# Allegro board TIDA-01606_Gate DriverE4_Sch_Rev1.brd
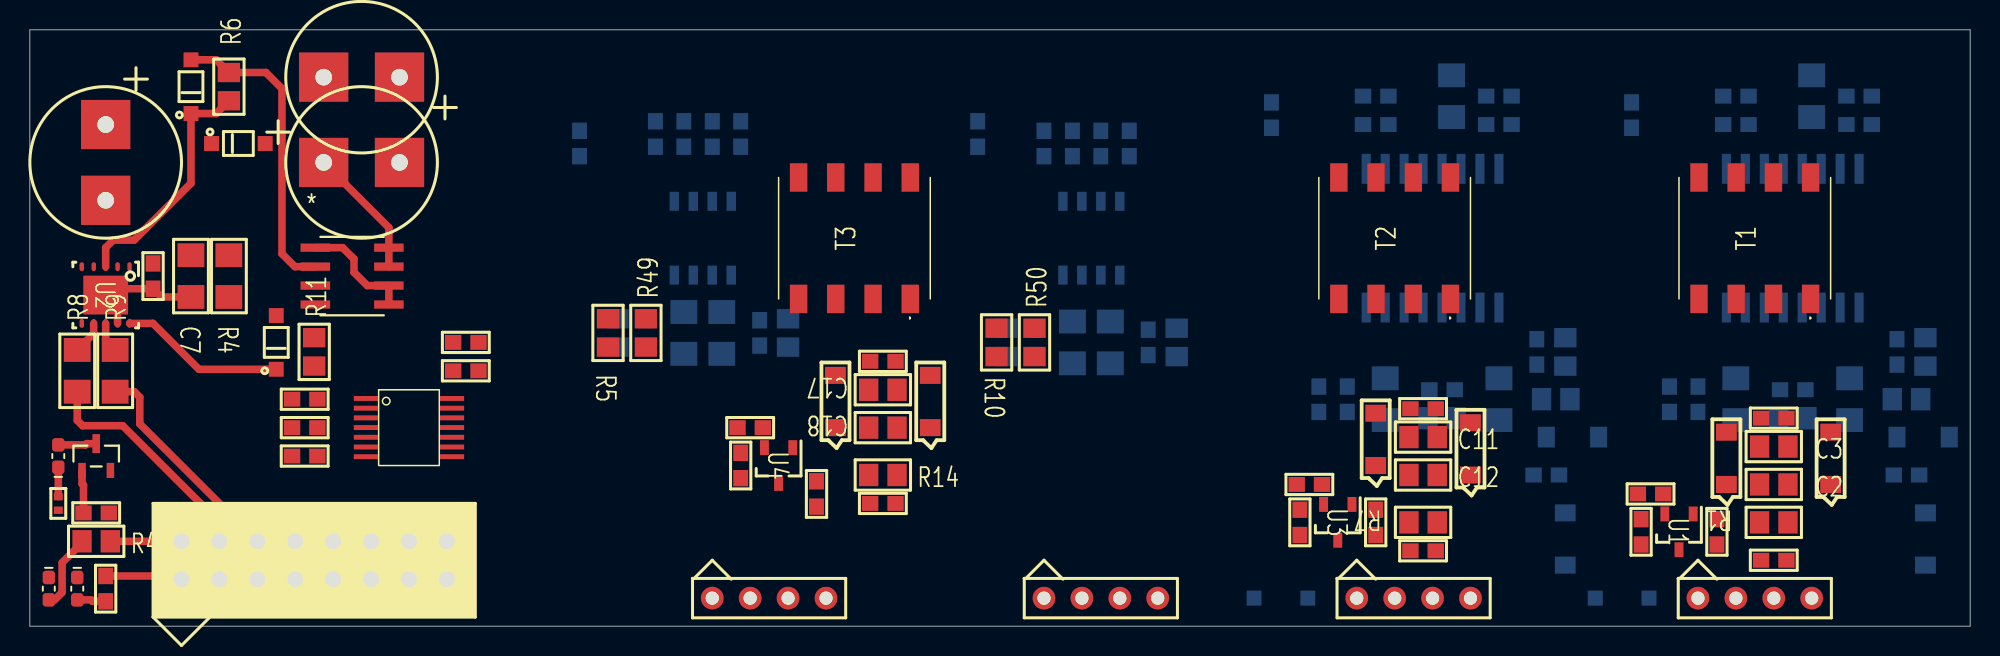
[diagram p0: board, top side]
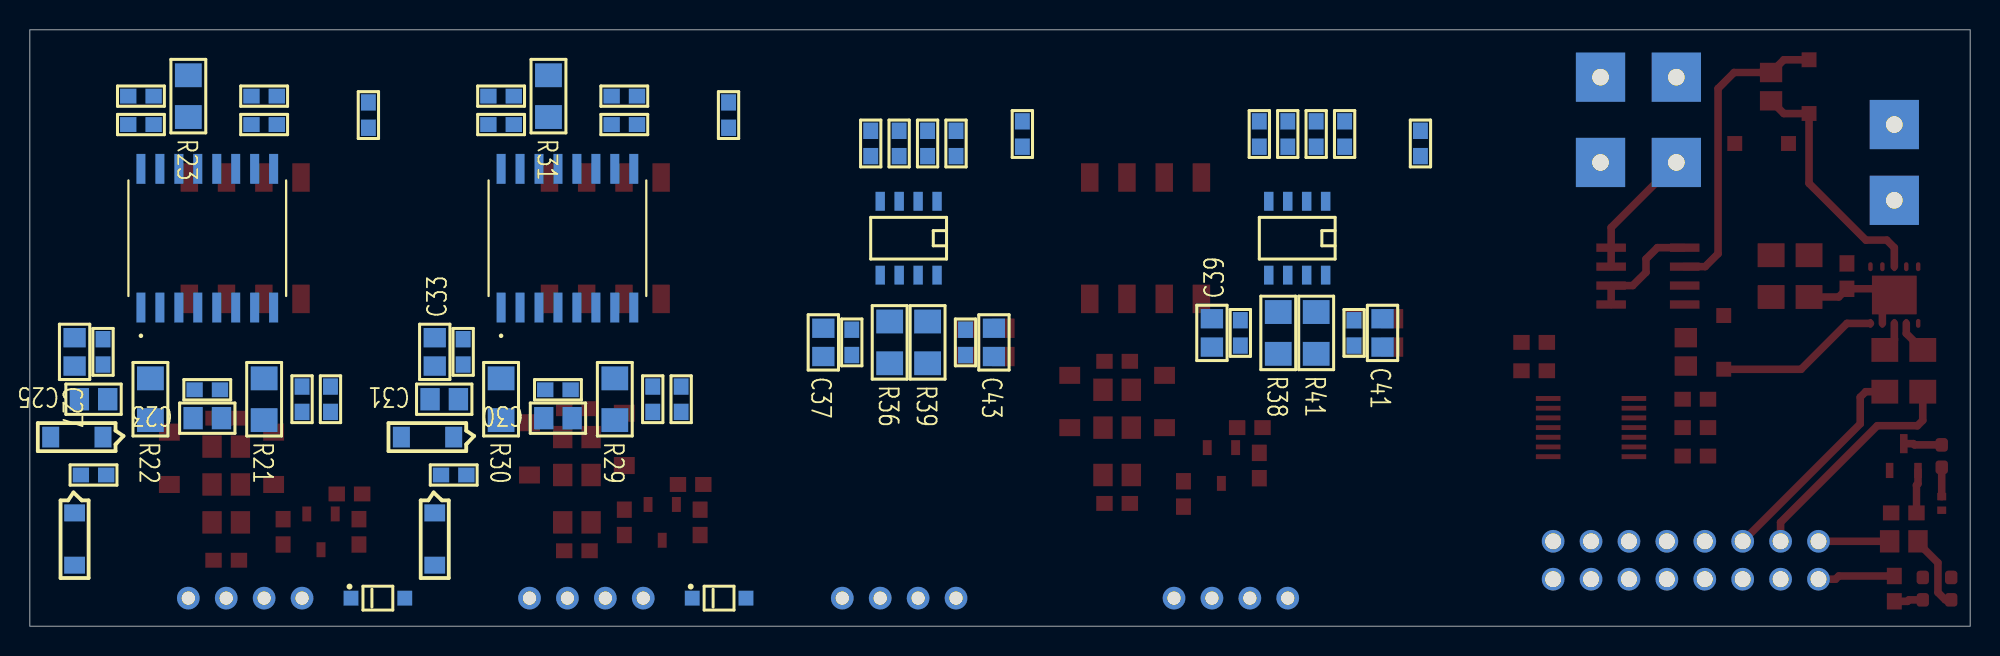
[diagram p1: board, bottom side, seen from below]

Outline 130 x 39.98 mm; copper layers: TOP, BOTTOM. Coordinates in mm from the lower left corner of the outline.
Outline path: 0,39.98 0,0 130,0 130,39.98 0,39.98

## Design rules (mm)
constraint set DEFAULT: min track width 0.127

## Placement (name value [footprint] x y rotation side)
C1  0.1u 0603 25V  [RES0603]  116.84 4.42 0 top
C2  4.7u 0805 50V  [SNPD0805_MODIFIED]  116.84 9.5 0 top
C3  4.7u 0805 50V  [SNPD0805_MODIFIED]  116.84 12.04 0 top
C4  0.1u 0603 25V  [RES0603]  116.84 13.94 0 top
C5  0.1u 0603 25V  [RES0603]  113.03 6.32 90 top
C6  3.3u 50V 105C  [CAP_SMD_PTH_470UF50V]  19.69 31.09 0 top
C7  10u 1206 50V  [SNPD1206_MODIFIED]  10.8 23.47 270 top
C8  0.33u 0603 50V  [RES0603]  8.25 23.47 270 top
C9  0.1u 63V 105C  [CAP_SMD_PTH_470UF50V]  5.08 33.63 270 top
C10  0.1u 0603 25V  [RES0603]  93.35 5.05 0 top
C11  4.7u 0805 50V  [SNPD0805_MODIFIED]  93.35 12.67 0 top
C12  4.7u 0805 50V  [SNPD0805_MODIFIED]  93.35 10.13 0 top
C13  0.1u 0603 25V  [RES0603]  93.35 14.58 0 top
C14  3.3u 50V 105C  [CAP_SMD_PTH_470UF50V]  24.77 36.8 180 top
C15  0.1u 0603 25V  [RES0603]  90.17 6.96 90 top
C16  0.1u 0603 25V  [RES0603]  57.15 8.23 180 top
C17  4.7u 0805 50V  [SNPD0805_MODIFIED]  57.15 15.85 180 top
C18  4.7u 0805 50V  [SNPD0805_MODIFIED]  57.15 13.31 180 top
C19  0.1u 0603 25V  [RES0603]  57.15 17.75 180 top
C20  0.1u 0603 25V  [RES0603]  52.71 8.86 90 top
C21  0.1u 0603 50V  [RES0603]  122.56 33.63 0 bottom
C22  0.1u 0603 50V  [RES0603]  118.11 15.85 0 bottom
C23  10u 0805 35V  [SNPD0805_MODIFIED]  118.11 13.94 0 bottom
C24  0.1u 0603 50V  [RES0603]  29.21 17.12 0 top
C25  100pF 0805 50V  [SNPD0805_MODIFIED]  125.73 15.21 0 bottom
C26  0.1u 0603 50V  [RES0603]  125.1 18.39 270 bottom
C27  10u 0805 35V  [SNPD0805_MODIFIED]  127 18.39 270 bottom
C28  0.1u 0603 50V  [RES0603]  98.43 33.63 0 bottom
C29  0.1u 0603 50V  [RES0603]  94.62 15.85 0 bottom
C30  10u 0805 35V  [SNPD0805_MODIFIED]  94.62 13.94 0 bottom
C31  100pF 0805 50V  [SNPD0805_MODIFIED]  102.24 15.21 0 bottom
C32  0.1u 0603 50V  [RES0603]  100.97 18.39 90 bottom
C33  10u 0805 35V  [SNPD0805_MODIFIED]  102.87 18.39 90 bottom
C34  0.1u 0603 50V  [RES0603]  69.85 32.36 90 bottom
C35  0.1u 0603 50V  [RES0603]  43.82 32.99 90 bottom
C36  0.1u 0603 50V  [RES0603]  74.93 19.02 270 bottom
C37  10u 0805 35V  [SNPD0805_MODIFIED]  76.84 19.02 270 bottom
C38  0.1u 0603 50V  [RES0603]  48.9 19.66 90 bottom
C39  10u 0805 35V  [SNPD0805_MODIFIED]  50.8 19.66 90 bottom
C40  0.1u 0603 50V  [RES0603]  41.28 19.66 270 bottom
C41  10u 0805 35V  [SNPD0805_MODIFIED]  39.37 19.66 270 bottom
C42  0.1u 0603 50V  [RES0603]  67.31 19.02 270 bottom
C43  10u 0805 35V  [SNPD0805_MODIFIED]  65.41 19.02 270 bottom
C44  100pF 0603 50V  [RES0603]  114.3 33.63 180 bottom
C45  100pF 0603 50V  [RES0603]  90.17 33.63 180 bottom
C46  100pF 0603 50V  [RES0603]  71.76 32.36 90 bottom
C47  100pF 0603 50V  [RES0603]  45.72 32.99 90 bottom
D1  MBR0580-TP  [SOD123]  120.65 9.5 90 top
D2  B160-13-F  [DO214]  13.97 32.36 0 top
D3  LSM115JE3/TR13  [DO214]  10.8 36.17 90 top
D4  MBR0580-TP  [SOD123]  96.52 10.13 90 top
D5  LSM115JE3/TR13  [DO214]  16.51 19.02 90 top
D6  MBR0580-TP  [SOD123]  90.17 10.77 90 top
D7  RS1MB-13-F  [DO214]  106.68 1.88 180 bottom
D8  MMSZ4699T1G 12V  [SOD123]  125.1 12.67 0 bottom
D9  RS1MB-13-F  [DO214]  83.82 1.88 180 bottom
D10  MMSZ4699T1G 12V  [SOD123]  101.6 12.67 0 bottom
D11  LED RED 0603  [LED0603]  1.91 11.4 90 top
D12  LED GREEN 0603  [LED0603]  3.18 2.51 270 top
D13  LED GREEN 0603  [LED0603]  1.27 2.51 270 top
D14  MBR0580-TP  [SOD123]  113.67 9.5 90 top
D15  MBR0580-TP  [SOD123]  60.33 13.31 90 top
D16  MBR0580-TP  [SOD123]  53.98 13.31 90 top
D17  MMSZ4683T1G 3V  [SOD123]  127 7.59 270 bottom
D18  MMSZ4683T1G 3V  [SOD123]  102.87 7.59 270 bottom
J1  HEADER 8X2  [CONN8X2]  10.16 3.15 0 top
J2  HEADER 4  [SIP4_RUP]  111.76 1.88 90 top
J3  HEADER 4  [SIP4_RUP]  88.9 1.88 90 top
J5  HEADER 4  [SIP4_RUP]  67.95 1.88 90 top
J6  HEADER 4  [SIP4_RUP]  45.72 1.88 90 top
Q1  NAMT20  [D8]  21.59 23.47 0 top
Q2  BC856A-7-F  [SOT23]  4.45 11.4 0 top
R1  4.7K 0805 5%  [SNPD0805_MODIFIED]  116.84 6.96 180 top
R2  4.99K 0603 1%  [RES0603]  108.59 8.86 0 top
R3  4.99K 0603 1%  [RES0603]  107.95 6.32 270 top
R4  0E 1206 5%  [SNPD1206_MODIFIED]  13.34 23.47 270 top
R5  0E 0805 5%  [SNPD0805_MODIFIED]  38.74 19.66 270 top
R6  17.8E 0805 1%  [SNPD0805_MODIFIED]  13.34 36.17 90 top
R7  4.7K 0805 5%  [SNPD0805_MODIFIED]  93.35 6.96 180 top
R8  0E 1206 5%  [SNPD1206_MODIFIED]  3.18 17.12 90 top
R9  0E 1206 5%  [SNPD1206_MODIFIED]  5.72 17.12 90 top
R10  0E 0805 5%  [SNPD0805_MODIFIED]  64.77 19.02 270 top
R11  17.8E 0805 1%  [SNPD0805_MODIFIED]  19.05 18.39 90 top
R12  4.99K 0603 1%  [RES0603]  85.73 9.5 0 top
R13  4.99K 0603 1%  [RES0603]  85.09 6.96 270 top
R14  4.7K 0805 5%  [SNPD0805_MODIFIED]  57.15 10.13 0 top
R15  4.99K 0603 1%  [RES0603]  48.26 13.31 0 top
R16  4.99K 0603 1%  [RES0603]  47.63 10.77 270 top
R17  10E 0603 1%  [RES0603]  122.56 35.53 180 bottom
R18  10E 0603 1%  [RES0603]  29.21 19.02 180 top
R19  100E 0603 1%  [RES0603]  114.3 35.53 0 bottom
R20  1K 0603 5%  [RES0603]  125.73 10.13 0 bottom
R21  2E 1206 1%  [SNPD1206_MODIFIED]  114.3 15.21 270 bottom
R22  2E 1206 1%  [SNPD1206_MODIFIED]  121.92 15.21 270 bottom
R23  0E 1206 5%  [SNPD1206_MODIFIED]  119.38 35.53 270 bottom
R24  0E 0603 5%  [RES0603]  18.42 15.21 0 top
R25  10K 0603 1%  [RES0603]  18.42 13.31 0 top
R26  10E 0603 1%  [RES0603]  98.43 35.53 180 bottom
R27  100E 0603 1%  [RES0603]  90.17 35.53 0 bottom
R28  1K 0603 5%  [RES0603]  101.6 10.13 0 bottom
R29  2E 1206 1%  [SNPD1206_MODIFIED]  90.81 15.21 270 bottom
R30  2E 1206 1%  [SNPD1206_MODIFIED]  98.43 15.21 270 bottom
R31  0E 1206 5%  [SNPD1206_MODIFIED]  95.25 35.53 270 bottom
R32  10K 0603 1%  [RES0603]  18.42 11.4 0 top
R33  10E 0603 1%  [RES0603]  67.95 32.36 270 bottom
R34  10E 0603 1%  [RES0603]  41.91 32.99 270 bottom
R35  100E 0603 1%  [RES0603]  73.66 32.36 270 bottom
R36  3.3E 1206 5%  [SNPD1206_MODIFIED]  72.39 19.02 270 bottom
R37  100E 0603 1%  [RES0603]  47.63 32.99 270 bottom
R38  3.3E 1206 5%  [SNPD1206_MODIFIED]  46.36 19.66 270 bottom
R39  3.3E 1206 5%  [SNPD1206_MODIFIED]  69.85 19.02 270 bottom
R40  20K 0603 1%  [RES0603]  4.45 7.59 180 top
R41  3.3E 1206 5%  [SNPD1206_MODIFIED]  43.82 19.66 270 bottom
R42  620E 0603 1%  [RES0603]  5.08 2.51 90 top
R43  1.3K 0805 5%  [SNPD0805_MODIFIED]  4.45 5.69 0 top
R44  120E 0402 5%  [RES0402]  1.91 8.23 90 top
R45  0E 0603  5%  [RES0603]  109.86 15.21 270 bottom
R46  NC  [RES0603]  111.76 15.21 270 bottom
R47  0E 0603  5%  [RES0603]  86.36 15.21 270 bottom
R48  NC  [RES0603]  88.27 15.21 270 bottom
R49  NC  [SNPD0805_MODIFIED]  41.28 19.66 90 top
R50  NC  [SNPD0805_MODIFIED]  67.31 19.02 90 top
R51  10K 0603 1%  [RES0603]  36.83 32.36 270 bottom
R52  10K 0603 1%  [RES0603]  63.5 32.99 270 bottom
R53  10K 0603 1%  [RES0603]  83.19 34.26 90 bottom
R54  10K 0603 1%  [RES0603]  107.32 34.26 90 bottom
T1  -  [750343804]  115.57 26.01 90 top
T2  -  [750343804]  91.44 26.01 90 top
T3  -  [750343804]  55.25 26.01 90 top
U1  DBZ0003A  [DBZ0003A_N]  110.49 6.32 270 top
U2  UCC27211DPRR  [DPR0010A]  5.08 22.2 270 top
U3  DBZ0003A  [DBZ0003A_N]  87.63 6.96 270 top
U4  DBZ0003A  [DBZ0003A_N]  50.17 10.77 270 top
U5  ISO5852SDWR  [DW0016A_N]  118.11 26.01 90 bottom
U6  SN74LVC126APWR  [TSSOP14]  25.4 13.31 0 top
U7  ISO5852SDWR  [DW0016A_N]  93.98 26.01 90 bottom
U8  UCC5320SCD  [SOIC8_REV1]  71.12 26.01 270 bottom
U9  UCC5320SCD  [SOIC8_REV1]  45.09 26.01 270 bottom

## Library data of the parts
C1-C5 C7 C8 C10-C13 C15-C47 = CAP NP: room: control_smps
C6 C9 C14 = CAP: room: 24Vcc3_smps
D1-D6 D8 D10 D14-D18 = DIODE ZENER: room: control_smps
D7 D9 = DIODE: room: pwmIC
D11-D13 = LED: room: lcd_led_pic
J1 = HEADER 8X2_0
J2 = HEADER 4_0
J3 = HEADER 4_1
J5 = HEADER 4_2
J6 = HEADER 4_3
Q1 = NAMT20_1: User Part Number: PN
Q2 = PNP BEC
R1-R54 = RESISTOR: room: control_smps
T1-T3 = TRANSFORMER STEPUP_0
U1 = DIODE ZENER_3: User Part Number: PN; Tolerance: TOL; room: control_smps
U2 = UCC21520ADWR_1: User Part Number: PN; Tolerance: TOL; room: DrvIC_Aph_driver
U3 U4 = DIODE ZENER_2: User Part Number: PN; Tolerance: TOL; room: control_smps
U5 = UCC21520ADWR_4: User Part Number: PN; Tolerance: TOL; room: DrvIC_Aph_driver
U6 = DM3AT-SF-PEJM5_2
U7 = UCC21520ADWR_5: User Part Number: PN; Tolerance: TOL; room: DrvIC_Aph_driver
U8 U9 = DM3AT-SF-PEJM5_1

## Footprints (pads in the part's own frame, mm; a bottom-side part is the same pattern mirrored in y, then rotated)
750343804
  rect 1.91x1.17 smd: 1(-4.07,-3.74) 2(-4.07,-1.25) 3(-4.07,1.25) 4(-4.07,3.74) 5(4.07,3.74) 6(4.07,1.25) 7(4.07,-1.25) 8(4.07,-3.74)
CAP_SMD_PTH_470UF50V
  rect 3.302x3.302 hole 1.118: 1(0,0) 2(5.08,0)
CONN8X2
  round 1.524 hole 1.067: 1(0,0) 2(0,2.54) 3(2.54,0) 4(2.54,2.54) 5(5.08,0) 6(5.08,2.54) 7(7.62,0) 8(7.62,2.54) 9(10.16,0) 10(10.16,2.54) 11(12.7,0) 12(12.7,2.54) 13(15.24,0) 14(15.24,2.54) 15(17.78,0) 16(17.78,2.54)
D8
  rect 1.981x0.559 smd: 1(-2.464,1.905) 2(-2.464,0.635) 3(-2.464,-0.635) 4(-2.464,-1.905) 5(2.464,-1.905) 6(2.464,-0.635) 7(2.464,0.635) 8(2.464,1.905)
DBZ0003A_N
  rect 1x0.6 smd: 1(-1.2,0.95) 2(-1.2,-0.95) 3(1.2,0)
DO214
  rect 1x1 smd: 1(-1.8,0) 2(1.8,0)
DPR0010A
  oval 0.6x0.3 smd: 1(-1.9,1.6) 2(-1.9,0.8) 3(-1.9,0) 4(-1.9,-0.8) 5(-1.9,-1.6) 6(1.9,-1.6) 7(1.9,-0.8) 8(1.9,0) 9(1.9,0.8) 10(1.9,1.6)
  rect 2.6x3 smd: 11(0,0)
DW0016A_N
  rect 2.007x0.61 smd: 1(-4.65,4.445) 2(-4.65,3.175) 3(-4.65,1.905) 4(-4.65,0.635) 5(-4.65,-0.635) 6(-4.65,-1.905) 7(-4.65,-3.175) 8(-4.65,-4.445) 9(4.65,-4.445) 10(4.65,-3.175) 11(4.65,-1.905) 12(4.65,-0.635) 13(4.65,0.635) 14(4.65,1.905) 15(4.65,3.175) 16(4.65,4.445)
LED0603
  custom 0.91x0.83 smd: 1(-0.75,0) 2(0.75,0)
RES0402
  rect 0.5x0.6 smd: 1(-0.455,0) 2(0.455,0)
RES0603
  rect 1.1x1 smd: 1(-0.85,0) 2(0.85,0)
SIP4_RUP
  round 1.524 hole 0.889: 1(0,0) 2(0,-2.54) 3(0,-5.08) 4(0,-7.62)
SNPD0805_MODIFIED
  rect 1.3x1.5 smd: 1(-0.95,0) 2(0.95,0)
SNPD1206_MODIFIED
  rect 1.6x1.8 smd: 1(-1.4,0) 2(1.4,0)
SOD123
  rect 1.143x1.397 smd: 1(0,0) 2(3.505,0)
SOIC8_REV1
  rect 1.27x0.635 smd: 1(-2.477,1.905) 2(-2.477,0.635) 3(-2.477,-0.635) 4(-2.477,-1.905) 5(2.477,-1.905) 6(2.477,-0.635) 7(2.477,0.635) 8(2.477,1.905)
SOT23
  rect 0.508x1.016 smd: 1(-0.95,-0.965) 2(0.95,-0.965)
  rect 0.508x1.283 smd: 3(0,0.832)
TSSOP14
  rect 1.651x0.33 smd: 1(-2.87,1.956) 2(-2.87,1.306) 3(-2.87,0.655) 4(-2.87,0.005) 5(-2.87,-0.645) 6(-2.87,-1.295) 7(-2.87,-1.946) 8(2.87,-1.946) 9(2.87,-1.295) 10(2.87,-0.645) 11(2.87,0.005) 12(2.87,0.655) 13(2.87,1.306) 14(2.87,1.956)

## Nets
+3V3: J1.1 Q2.2(EMITTER) R17.1 R18.1 R26.1 R32.2 R33.1 R34.1 R42.2
+12V_MID: C16.1 C17.1 C18.1 C19.1 C36.1 C37.1 C38.1 C39.1 D15.1(CATHODE) D16.1(CATHODE) R14.2 U8.5 U9.5
+15V: C6.1 J1.2 Q1.7 Q1.8 R4.2 R43.2
+20V_BOT: C10.1 C11.1 C12.1 C13.1 C29.1 C30.1 D4.1(CATHODE) D6.1(CATHODE) R7.2 U7.5
+20V_TOP: C1.1 C2.1 C3.1 C4.1 C22.1 C23.1 D1.1(CATHODE) D14.1(CATHODE) R1.2 U5.5
-5V_BOT: C11.2 C12.2 C13.2 C15.2 C32.1 C33.1 R13.1 T2.2 U3.2 U7.1 U7.8(VEE2A)
-5V_MID: C17.2 C18.2 C19.2 C20.2 R5.2 R10.2 R16.1 T3.2 U4.2
-5V_TOP: C2.2 C3.2 C4.2 C5.2 C26.1 C27.1 R3.1 T1.2 U1.2 U5.1 U5.8(VEE2A)
0: C1.2 C5.1 C7.2 C8.2 C10.2 C14.2 C15.1 C16.2 C20.1 C21.2 C22.2 C23.2 C24.2 C25.2 C26.2 C27.2 C28.2 C29.2 C30.2 C31.2 C32.2 C33.2 C34.2 C35.2 C36.2 C37.2 C38.2 C39.2 C40.2 C41.2 C42.2 C43.2 C44.2 C45.2 C46.2 C47.2 D8.2 D10.2 D12.1(CATHODE) D13.1(CATHODE) J1.15 J1.16 J2.3 J3.3 J5.3 J6.3 Q1.3(S2) R1.1 R2.2 R7.1 R12.2 R14.1 R15.2 R25.1 R44.1 R45.2 R47.2 R49.1 R50.1 R51.1 R52.1 R53.1 R54.1 U1.1 U2.9(VSS) U2.11 U3.1 U4.1 U5.3 U5.9 U5.11 U5.16 U6.7 U7.3 U7.9 U7.11 U7.16 U8.3 U8.4 U9.3 U9.4
DESAT_BOT: D9.1(K) J3.1
DESAT_TOP: D7.1(K) J2.1
FLT: J1.7 R32.1 R40.1 U5.13 U7.13
GATE_BOT: J3.4 R29.2 R30.2 R48.2
GATE_MID_BOT: J6.4 R38.2 R41.2
GATE_MID_TOP: J5.4 R36.2 R39.2
GATE_TOP: J2.4 R21.2 R22.2 R46.2
HI_PWM: J1.4 R8.1
HS: C9.2 Q1.1 Q1.5 Q1.6 T1.7 T2.7 T3.7 U2.4
HSG: D3.1(CATHODE) R6.1 U2.3
LI_PWM: J1.6 R9.1
LS1: C6.2 C14.1 T1.6 T2.6 T3.6
LSG: D5.1(CATHODE) R11.1 U2.10
PWM1: J1.11 R19.1 R54.2 U6.2 U6.3
PWM2: J1.12 R27.1 R53.2 U6.5 U6.6
PWM3: J1.13 R35.1 R52.2 U6.8 U6.9
PWM4: J1.14 R37.1 R51.2 U6.11 U6.12
PWM_EN: J1.9 R24.1
RDY: J1.5 U5.12 U7.12
RST: J1.3 R23.1 R31.1
N14260728: R8.2 U2.7
N14260730: R9.2 U2.8
N14260848: C7.1 C8.1 D2.2 R4.1 U2.1
N14261056: C9.1 D2.1(CATHODE) U2.2
N14261289: D3.2 Q1.2 R6.2
N14261406: D5.2 Q1.4 R11.2
N14262465: D1.2 T1.1
N14262469: D14.2 T1.3
N14263632: R2.1 R3.2 U1.3(REF)
N14266555: D4.2 T2.1
N14266595: D6.2 T2.3
N14266769: R12.1 R13.2 U3.3(REF)
N14267414: D15.2 T3.1
N14267454: D16.2 T3.3
N14267628: R15.1 R16.2 U4.3(REF)
N14268473: C21.1 R17.2 U5.15
N14268603: C44.1 R19.2 U5.10
N14268836: R23.2 U5.14
N14269969: C25.1 D8.1(CATHODE) R20.1 U5.2
N14270095: R45.1 R46.1 U5.7
N14270209: R22.1 U5.4
N14270213: R21.1 U5.6
N14271306: C28.1 R26.2 U7.15
N14271358: C45.1 R27.2 U7.10
N14271436: R31.2 U7.14
N14271630: C31.1 D10.1(CATHODE) R28.1 U7.2
N14271680: R47.1 R48.1 U7.7
N14271756: R30.1 U7.4
N14271760: R29.1 U7.6
N14273731: C34.1 R33.2 U8.1
N14274223: C46.1 R35.2 U8.2
N14275263: R36.1 U8.6
N14275267: R39.1 U8.7
N14275449: C42.1 C43.1 R10.1 R50.2 U8.8(VEE2)
N14277948: C35.1 R34.2 U9.1
N14278020: C47.1 R37.2 U9.2
N14278158: R38.1 U9.6
N14278178: R41.1 U9.7
N14278260: C40.1 C41.1 R5.1 R49.2 U9.8(VEE2)
N14279464: C24.1 R18.2 U6.14(VCC)
N14279480: R24.2 R25.2 U6.1 U6.4 U6.10 U6.13
N14283740: D12.2 R42.1
N14284020: D13.2 R43.1
N14289569: Q2.1 R40.2
N14289599: D11.2 Q2.3
N14303671: D17.1(CATHODE) R20.2
N142699350: D7.2 D17.2
N142715901: D18.1(CATHODE) R28.2
N142716060: D9.2 D18.2
N142895931: D11.1(CATHODE) R44.2

Pads without a net: J1 8 10; J2 2; J3 2; J5 1 2; J6 1 2; T1 4 5 8; T2 4 5 8; T3 4 5 8; U2 5 6

## Routing (per net, layer and track width the routed paths; a pad name or vN(x,y) marks a point on that pad's centre or on a via; arc(x,y) is an arc through that point)
+3V3: length 5.2
  TOP w0.508: J1.1 9.02,3.15 8.8,3.36 R42.2
+15V: length 13.6
  TOP w0.508: R43.2 J1.2 ; C6.1 24.05,26.72 Q1.8 Q1.7
0: length 8.3
  TOP w0.508: U2.9 5.88,21.4 U2.11 5.5,22.62 C8.2 8.81,22.07 C7.2
HI_PWM: length 15.6
  TOP w0.508: J1.4 12.7,6.96 6.22,13.44 3.53,13.44 3.18,13.8 R8.1
HS: length 7.8
  TOP w0.508: Q1.5 Q1.6 22.61,22.83 21.72,23.72 21.72,24.61 20.96,25.37 Q1.1
HSG: length 16.3
  TOP w0.508: R6.1 12.48,34.37 D3.1 10.8,29.69 6.99,25.88 5.59,25.88 5.08,25.37 U2.3
LI_PWM: length 14.7
  TOP w0.508: J1.6 7.37,13.56 7.37,15.35 7,15.72 R9.1
LSG: length 11.1
  TOP w0.508: U2.10 8.25,20.3 11.33,17.22 D5.1
N14260728: length 2.2
  TOP w0.508: R8.2 4.28,19.62 U2.7
N14260730: length 2
  TOP w0.508: R9.2 5.08,19.15 U2.8
N14261289: length 20.6
  TOP w0.508: Q1.2 17.75,24.1 16.89,24.97 16.89,36.04 15.81,37.12 R6.2 12.48,37.97 D3.2
N14283740: length 1.9
  TOP w0.508: R42.1 4.2,1.66 4.1,1.76 D12.2
N14284020: length 5.1
  TOP w0.508: D13.2 1.66,1.76 2.16,2.26 2.16,4.25 3.5,5.59 R43.1
N14289569: length 2.9
  TOP w0.508: Q2.1 3.5,9.55 3.6,9.45 R40.2
N14289599: length 2.6
  TOP w0.508: Q2.3 3.81,12.24 3.73,12.15 D11.2
N142895931: length 2
  TOP w0.508: R44.2 D11.1
